# Allegro board QUADCOPTER1mthrbrd1_1.brd
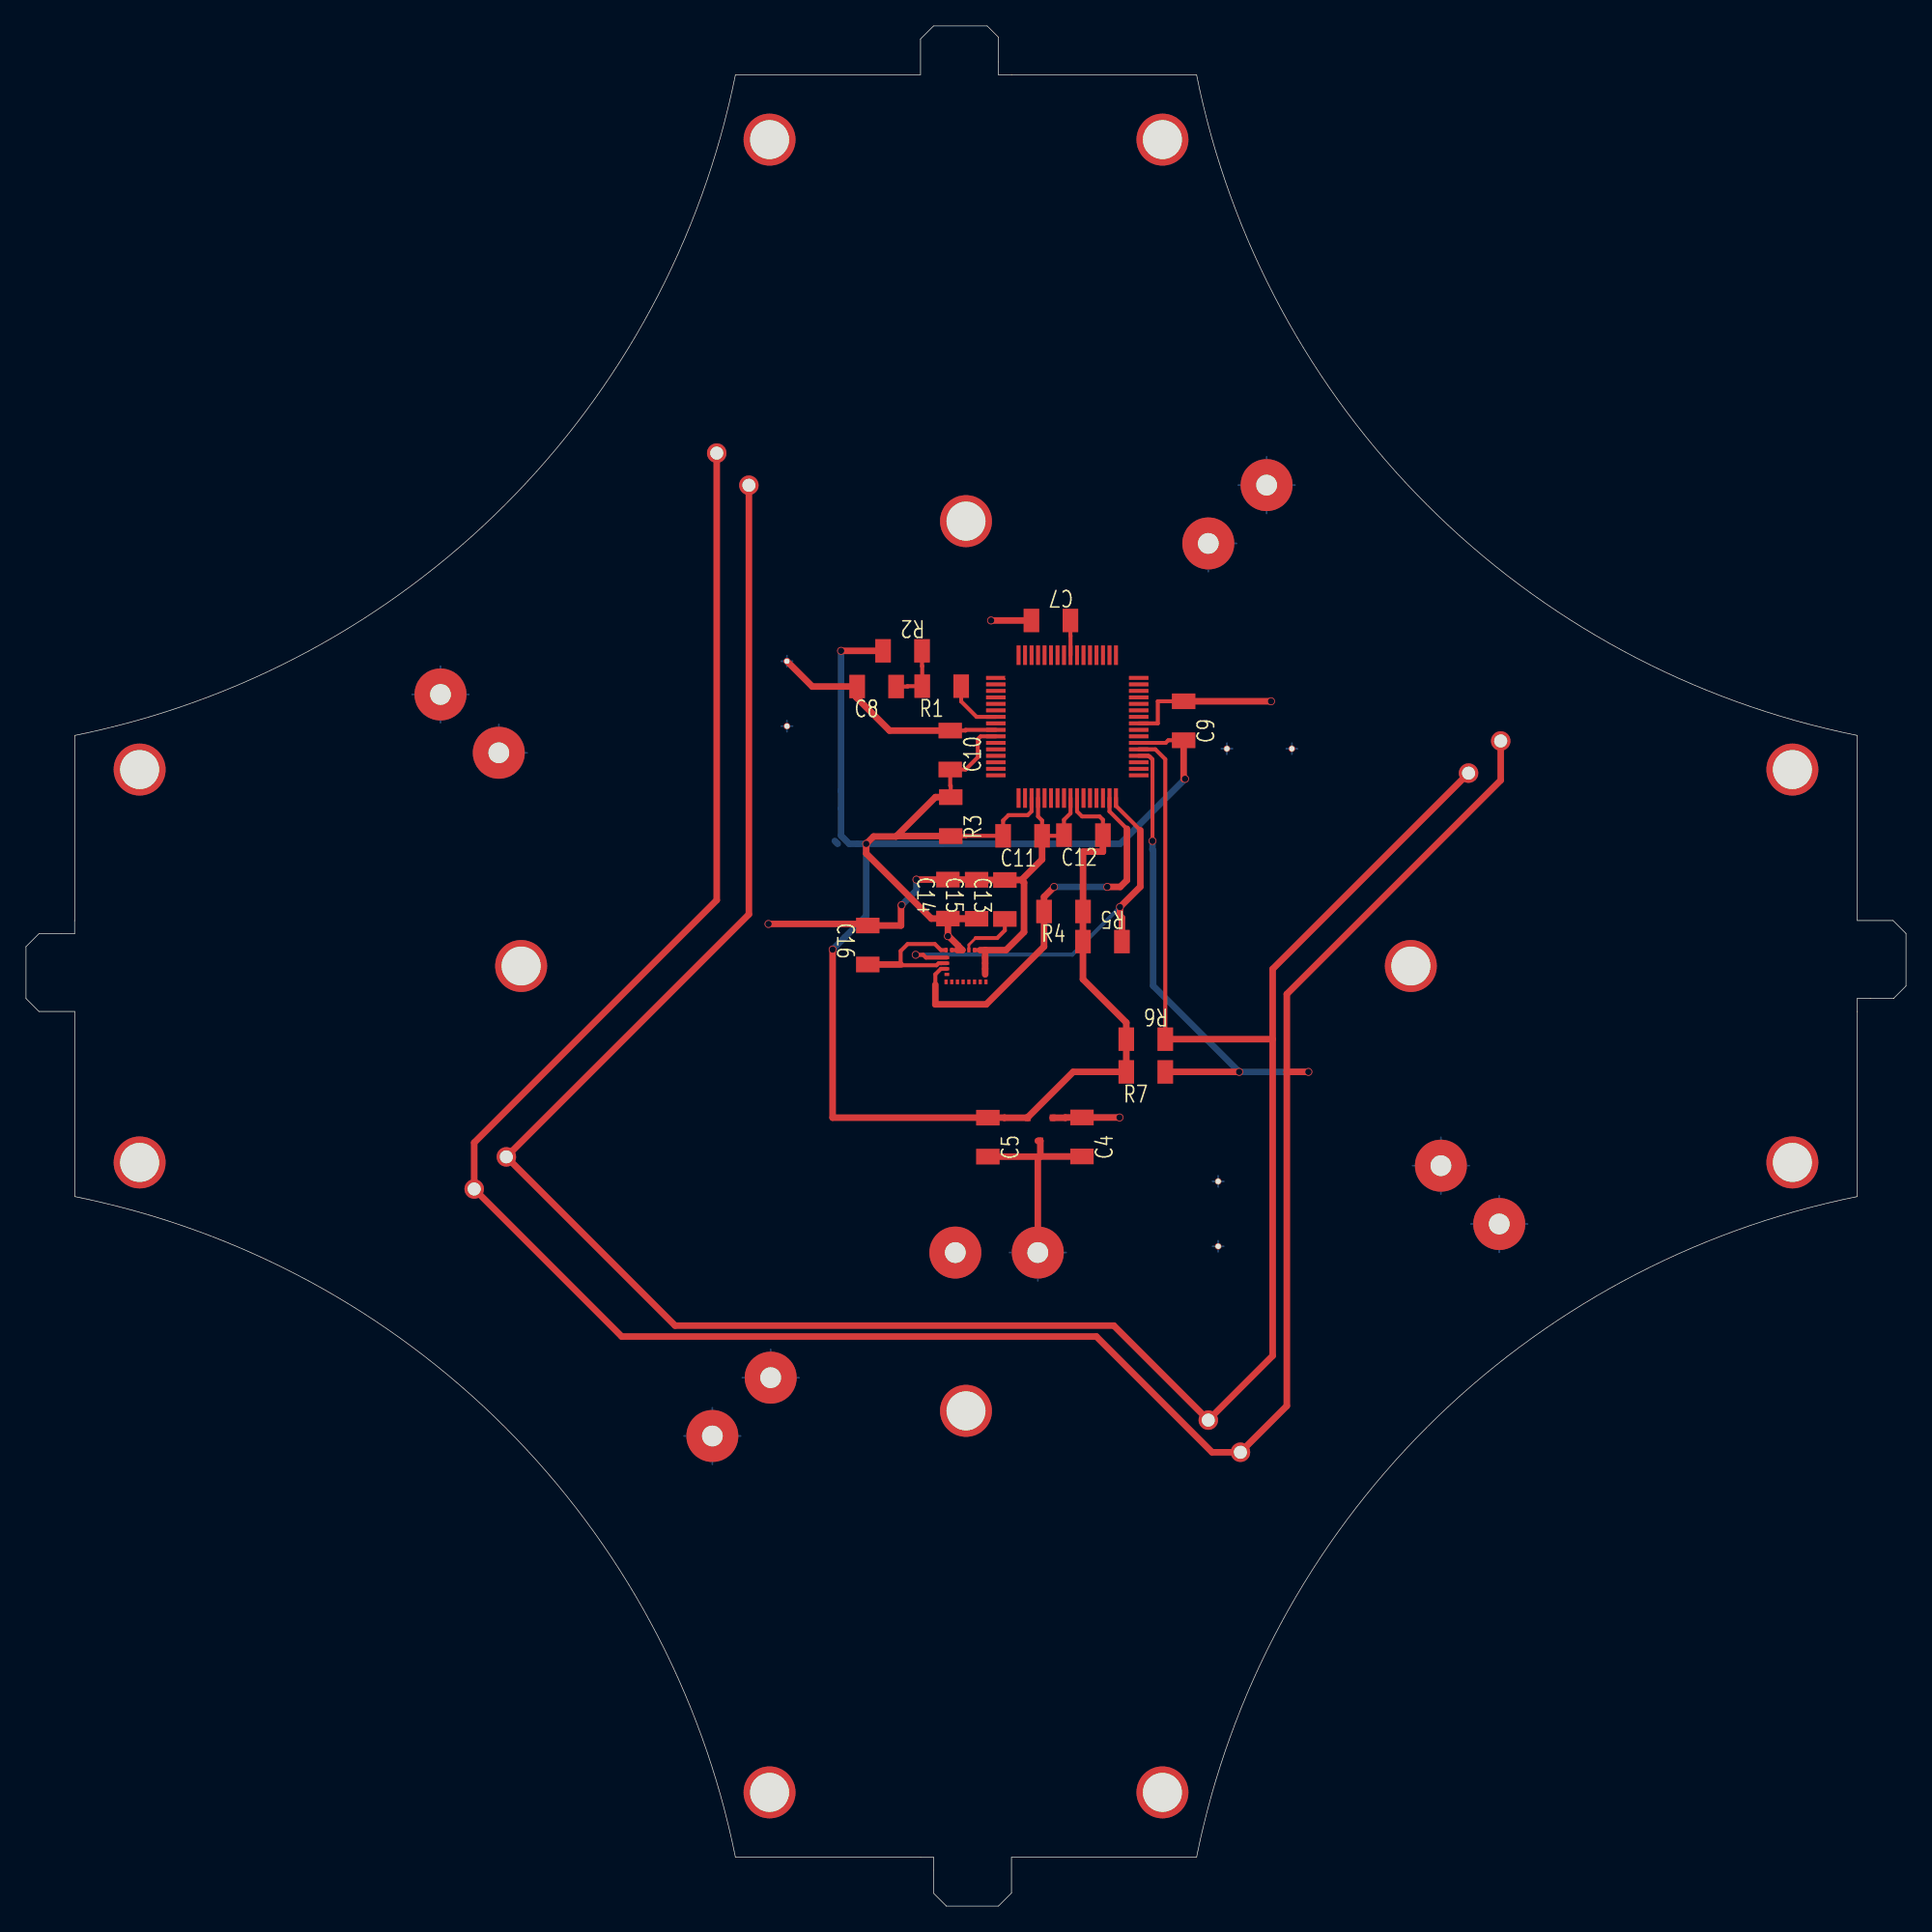
[diagram p0: board, top side]
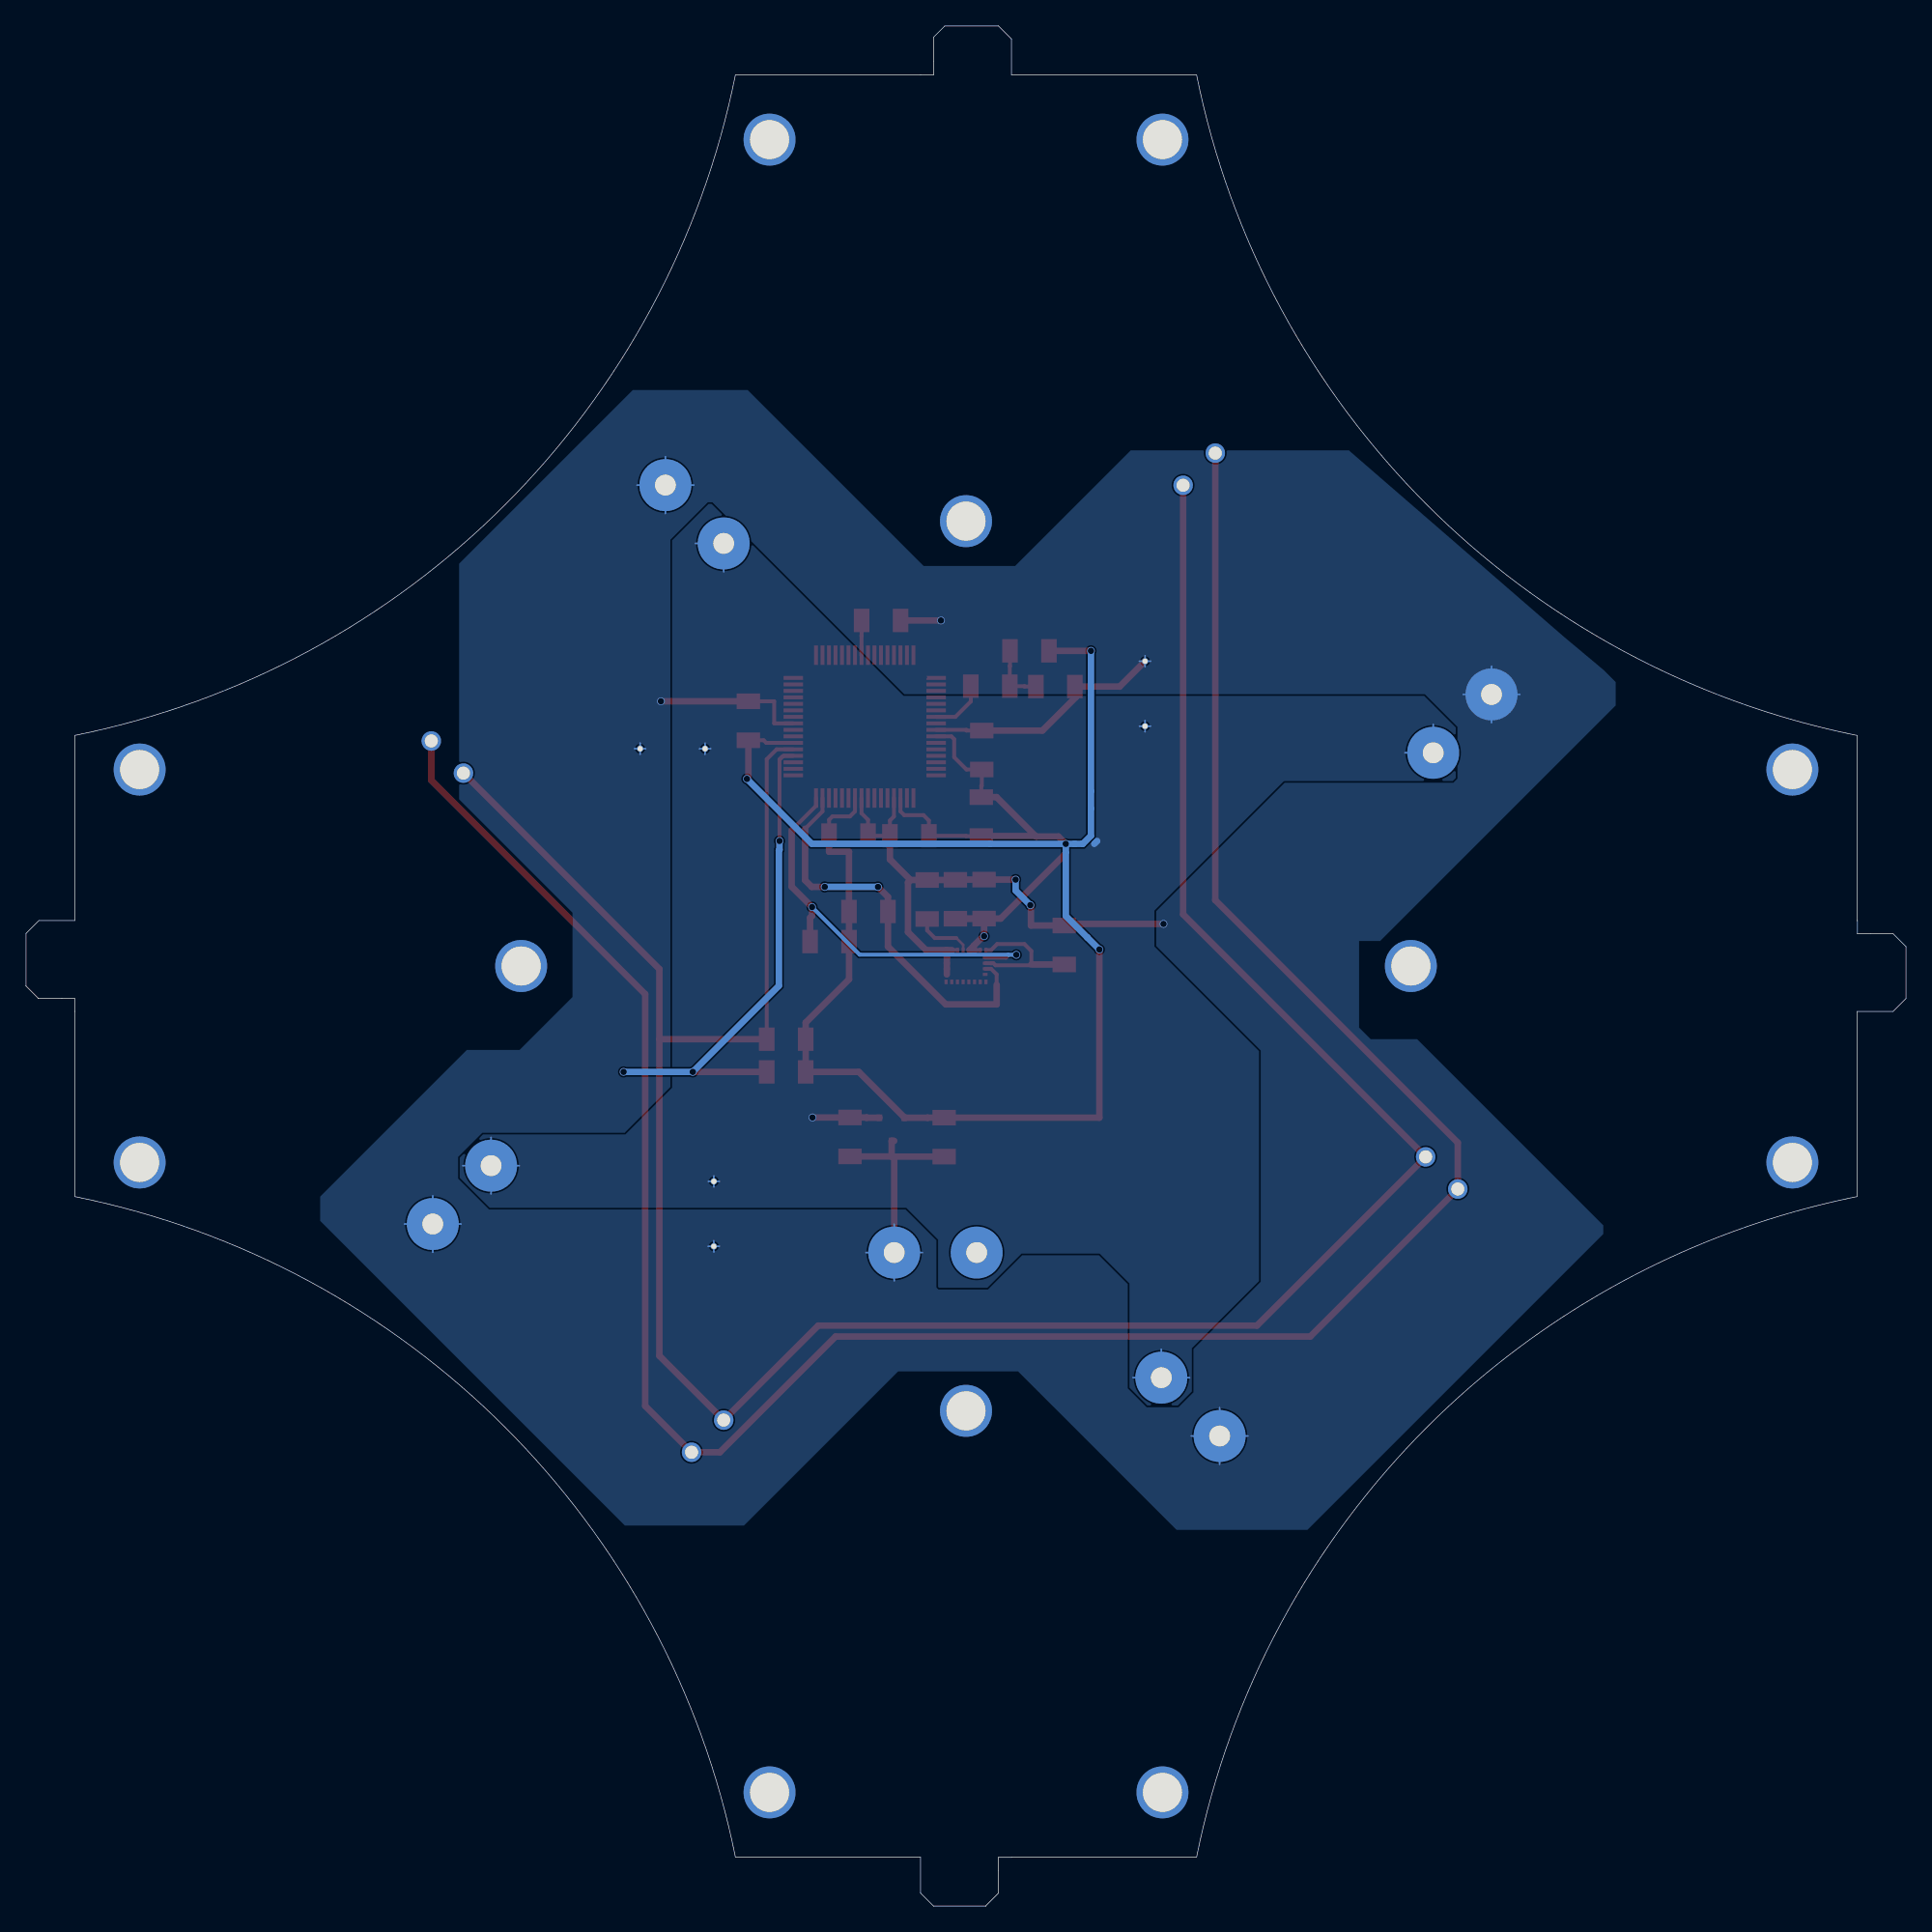
[diagram p1: board, bottom side, seen from below]

Outline 144.75 x 144.75 mm; copper layers: TOP, BOTTOM. Coordinates in mm from the lower left corner of the outline.
Outline path: 0,73.87 0,69.88 1,68.88 3.75,68.88 3.75,54.62 arc(36.87,36.87) 54.62,3.75 68.88,3.75 68.88,3.75 69.86,3.75 69.88,3.73 69.88,0.99 70.86,0.01 70.86,0 74.88,0 75.88,1 75.88,3.75 90.12,3.75 arc(107.88,36.87) 141,54.62 141,68.88 141,68.88 141,68.88 141,69.88 142,69.88 142,69.88 143.81,69.88 143.81,69.89 144.75,70.84 144.75,74.88 143.75,75.88 141,75.88 141,90.12 arc(107.88,107.88) 90.12,141 75.88,141 75.87,141 74.87,141 74.88,142 74.88,143.88 74.01,144.75 69.88,144.75 68.88,143.75 68.88,141 54.62,141 arc(36.87,107.88) 3.75,90.12 3.75,75.88 3.74,75.87 3.74,74.88 3.74,74.88 1.01,74.88 0,73.87

## Placement (name value [footprint] x y rotation side)
C1  100uF  [CAP250]  88.79 58.79 270 top
C2  100uF  [CAP250]  61.59 87.84 90 top
C3  100uF  [CAP250]  89.46 86.11 0 top
C4  10uF  [SMD_CAP_1206]  81.31 59.21 90 top
C5  10uF  [SMD_CAP_1206]  74.06 59.2 90 top
C7  10uF  [SMD_CAP_1206]  78.91 98.98 180 top
C8  10uF  [SMD_CAP_1206]  65.49 93.89 0 top
C9  .1uF  [SMD_CAP_1206]  89.13 91.26 90 top
C10  .1uF  [SMD_CAP_1206]  71.16 89 90 top
C11  .1uF  [SMD_CAP_1206]  76.73 82.4 0 top
C12  .1uF  [SMD_CAP_1206]  81.42 82.45 0 top
C13  10uF  [SMD_CAP_1206]  75.37 77.5 270 top
C14  100nF  [SMD_CAP_1206]  70.98 77.53 270 top
C15  10uF  [SMD_CAP_1206]  73.19 77.51 270 top
C16  100nF  [SMD_CAP_1206]  64.81 73.99 270 top
J1  CON2  [KDCONN2]  71.55 50.31 0 top
J2  CON2  [KDCONN2]  108.94 57 315 top
J3  CON2  [KDCONN2]  57.34 40.68 225 top
J4  CON2  [KDCONN2]  36.4 88.79 135 top
J5  CON2  [KDCONN2]  91.03 104.91 45 top
J6  CON2  [KDCONN2_2]  36.99 57.68 225 top
J7  CON2  [KDCONN2_2]  91.03 37.41 315 top
J8  CON2  [KDCONN2_2]  111.07 87.22 45 top
J9  CON2  [KDCONN2_2]  55.66 109.39 135 top
NOREF  -  [unnamed]  87.5 8.75 0 top
NOREF#2  -  [unnamed]  106.62 72.38 0 top
NOREF#3  -  [unnamed]  57.25 136 0 top
NOREF#4  -  [unnamed]  8.75 57.25 0 top
NOREF#5  -  [unnamed]  38.12 72.38 0 top
NOREF#6  -  [unnamed]  136 57.25 0 top
NOREF#7  -  [unnamed]  72.38 106.62 0 top
NOREF#8  -  [unnamed]  87.5 136 0 top
NOREF#9  -  [unnamed]  8.75 87.5 0 top
NOREF#10  -  [unnamed]  57.25 8.75 0 top
NOREF#11  -  [unnamed]  72.38 38.12 0 top
NOREF#12  -  [unnamed]  136 87.5 0 top
R1  470  [SMD_CAP_1206]  70.5 93.92 0 top
R2  10k  [SMD_CAP_1206]  67.49 96.64 180 top
R3  10  [SMD_CAP_1206]  71.2 83.88 90 top
R4  10k  [SMD_CAP_1206]  79.89 76.57 0 top
R5  10k  [SMD_CAP_1206]  82.88 74.25 180 top
R6  10k  [SMD_CAP_1206]  86.22 66.74 180 top
R7  10k  [SMD_CAP_1206]  86.22 64.22 0 top
U1  PIC32MX440F256H  [PIC32MX440]  80.17 90.81 0 top
U5  LSM330_SENSOR  [SENSOR]  72.38 72.38 0 top
U6  LP38690-TO252  [SOT23]  78.1 59.8 270 top

## Library data of the parts
C1-C3 = CAP
C4 C5 C7-C16 = C
J1-J9 = CON2
R1-R7 = R
U1 = PIC32MX440F256H_9
U5 = LSM330_SENSOR_0
U6 = LP38690-TO252

## Footprints (pads in the part's own frame, mm; a bottom-side part is the same pattern mirrored in y, then rotated)
CAP250
  round 0.5 hole 0.4: 1(3,3) 2(8,3)
KDCONN2
  round 4 hole 1.6: 1(0,0) 2(6.35,0)
KDCONN2_2
  round 1.5 hole 1: 1(0,0) 2(3.5,0)
PIC32MX440
  custom 1.5x0.3 smd: 1(-5.5,3.75)
  rect 1.5x0.3 smd: 2(-5.5,3.25) 3(-5.5,2.75) 4(-5.5,2.25) 5(-5.5,1.75) 6(-5.5,1.25) 7(-5.5,0.75) 8(-5.5,0.25) 9(-5.5,-0.25) 10(-5.5,-0.75) 11(-5.5,-1.25) 12(-5.5,-1.75) 13(-5.5,-2.25) 14(-5.5,-2.75) 15(-5.5,-3.25) 16(-5.5,-3.75) 33(5.5,-3.75) 34(5.5,-3.25) 35(5.5,-2.75) 36(5.5,-2.25) 37(5.5,-1.75) 38(5.5,-1.25) 39(5.5,-0.75) 40(5.5,-0.25) 41(5.5,0.25) 42(5.5,0.75) 43(5.5,1.25) 44(5.5,1.75) 45(5.5,2.25) 46(5.5,2.75) 47(5.5,3.25) 48(5.5,3.75)
  rect 0.3x1.5 smd: 17(-3.75,-5.5) 18(-3.25,-5.5) 19(-2.75,-5.5) 20(-2.25,-5.5) 21(-1.75,-5.5) 22(-1.25,-5.5) 23(-0.75,-5.5) 24(-0.25,-5.5) 25(0.25,-5.5) 26(0.75,-5.5) 27(1.25,-5.5) 28(1.75,-5.5) 29(2.25,-5.5) 30(2.75,-5.5) 31(3.25,-5.5) 32(3.75,-5.5) 49(3.75,5.5) 50(3.25,5.5) 51(2.75,5.5) 52(2.25,5.5) 53(1.75,5.5) 54(1.25,5.5) 55(0.75,5.5) 56(0.25,5.5) 57(-0.25,5.5) 58(-0.75,5.5) 59(-1.25,5.5) 60(-1.75,5.5) 61(-2.25,5.5) 62(-2.75,5.5) 63(-3.25,5.5) 64(-3.75,5.5)
SENSOR
  custom 0.24x0.36 smd: 1(-1.535,1.225)
  rect 0.36x0.24 smd: 2(-1.475,0.645) 3(-1.475,0.215) 4(-1.475,-0.215) 5(-1.475,-0.645) 14(1.475,-0.645) 15(1.475,-0.215) 16(1.475,0.215) 17(1.475,0.645)
  rect 0.24x0.36 smd: 6(-1.535,-1.225) 7(-1.096,-1.225) 8(-0.658,-1.225) 9(-0.219,-1.225) 10(0.219,-1.225) 11(0.658,-1.225) 12(1.097,-1.225) 13(1.535,-1.225) 18(1.535,1.225) 19(1.096,1.225) 20(0.658,1.225) 21(0.219,1.225) 22(-0.219,1.225) 23(-0.658,1.225) 24(-1.097,1.225)
SMD_CAP_1206
  rect 1.2x1.8 smd: 1(-1.5,0) 2(1.5,0)
SOT23
  rect 0.508x0.432 smd: 1(-0.889,0.94) 2(-0.889,-0.965) 3(0.889,0)
unnamed
  round 4 hole 3 unplated: (0,0)

## Nets
3.3V: C5.2 C9.1 C10.1 C11.1 C12.2 C14.2 C15.2 R2.2 R3.1 R3.2 R4.2 R5.2 R6.2 R7.1 U1.10(VDD#10) U1.19(AVDD) U1.26(VDD#26) U1.38(VDD#38) U5.22(VDD#22) U5.23(VDD#23) U5.24(VDD#24) U6.2(VOUT)
12V: C1.1 C2.1 C3.1 C4.2 J2.1 J3.1 J4.1 J5.1 U6.1(VIN)
GND: C1.2 C2.2 C3.2 C4.1 C5.1 C7.2 C8.1 C9.2 C10.2 C11.2 C12.1 C13.1 C14.1 C15.1 C16.1 J1.2 J2.2 J3.2 J4.2 J5.2 U1.9(VSS#9) U1.20(AVSS) U1.25(VSS#25) U1.41(VSS#41) U5.14(RES3) U5.15(RES2) U5.16(RES1) U5.17(RES0) U5.18(RES) U5.19(GND#19) U5.20(GND#20) U6.3(GND)
SCL1: J6.1 J7.1 J8.1 J9.1 R6.1 U1.37(SCL1)
SCL2: R5.1 U1.32(SCL2) U5.2(SCL_A/G)
SDA1: J6.2 J7.2 J8.2 J9.2 R7.2 U1.36(SDA1)
SDA2: R4.1 U1.31(SDA2) U5.4(SDA/SDL_A/G)
N01207: C8.2 R1.1 R2.1
N159586: J1.1
N160545: C16.2 U5.1(VDD_IO#1) U5.3(VDD_IO#3)
N168078: C13.2 U5.21(CAP)
N186406: R1.2 U1.7($0)
N193232: C7.1 U1.56(VCAP)

Pads without a net: U1 1 2 3 4 5 6 8 11 12 13 14 15 16 17 18 21 22 23 24 27 28 29 30 33 34 35 39 40 42 43 44 45 46 47 48 49 50 51 52 53 54 55 57 58 59 60 61 62 63 64; U5 5 6 7 8 9 10 11 12 13

## Via types
v1: diameter 0.6, hole 0.5, TOP to BOTTOM, 18 vias

## Routing (per net, layer and track width the routed paths; a pad name or vN(x,y) marks a point on that pad's centre or on a via; arc(x,y) is an arc through that point)
3.3V: length 169.7
  TOP w0.3: U5.23 U5.24 ; U1.38 87.75,89.56 87.95,89.76 C9.1 ; U1.26 80.92,84.28 81.31,83.89 82.66,83.89 82.92,83.63 C12.2 ; R3.1 72.38,82.38 72.38,82.4 C11.1 75.23,83.58 75.65,83.99 77.13,83.99 77.42,84.28 U1.19 ; R3.2 71.2,86.25 71.16,86.25 71.16,87.5 72.34,87.5 73.28,88.45 73.28,89.84 73.5,90.06 U1.10 ; 72.1,73.6 U5.22
  TOP w0.5: C9.1 89.13,86.78 v1(89.24,86.78) ; 67.02,82.38 66.99,82.34 65.26,82.34 v1(64.69,81.78) 64.69,81.04 69.7,76.03 C14.2 ; 67.02,82.38 70.02,85.38 R3.2 ; 67.02,82.38 R3.1 ; C12.2 82.92,81.18 81.39,81.18 R4.2 81.38,76.57 R5.2 81.38,71.35 84.72,68.02 R6.2 R7.1 80.63,64.22 77.13,60.73 U6.2 75.34,60.69 75.34,60.7 C5.2 62.11,60.7 v1(62.11,73.64) ; 71.91,76.01 C15.2 73.19,76.03 C14.2 ; C14.2 70.98,74.67 v1(70.98,74.67) 71.04,74.67 71.78,73.94 71.78,73.92 72.1,73.6 U5.23 ; R2.2 v1(62.75,96.64)
  BOTTOM w0.5: v1(89.24,86.78) 84.24,81.79 70.56,81.79 70.55,81.78 v1(64.69,81.78) ; v1(62.75,96.64) 62.75,85.86 62.75,84.48 62.75,84.48 62.75,82.41 63.38,81.78 64.02,81.78 64.02,81.78 v1(64.69,81.78) ; v1(64.69,81.78) 64.69,81.1 64.69,76.23 63.04,74.57 v1(62.11,73.64)
12V: length 34.6
  TOP w0.5: v1(84.2,60.71) C4.2 80.03,60.71 80.03,60.69 U6.1
  BOTTOM w0.127: 92.46,88.68 C3.1 ; C3.1 92.04,89.11 ; C3.1 92.46,89.53 ; C3.1 92.89,89.11 ; 36.4,90.97 J4.1 38.58,88.79 ; 91.36,55.79 C1.1 ; C1.1 92.22,55.79 ; C1.1 91.79,55.36 ; C1.1 91.79,56.22 ; J2.1 111.12,57 ; J2.1 108.94,59.18 ; J2.1 108.94,54.82 ; J2.1 106.76,57 ; C2.1 58.59,91.27 ; C2.1 58.16,90.84 ; C2.1 59.02,90.84 ; C2.1 58.59,90.41 ; 55.16,40.68 J3.1 ; J3.1 57.34,42.86 ; J3.1 59.51,40.68 ; 93.21,104.91 J5.1 91.03,102.73
  BOTTOM w0.5: 62.28,82 62.5,81.78
GND: length 143.4
  TOP w0.3: U1.20 77.92,83.89 78.23,83.58 C11.2 79.92,82.4 C12.1 79.92,83.63 80.42,84.14 U1.25 ; C9.2 87.14,92.76 87.14,91.06 U1.41 ; C10.2 72.34,90.5 72.34,90.56 U1.9 ; U5.20 U5.19
  TOP w0.5: C2.2 60.54,93.89 63.92,93.89 ; 73.85,73.6 U5.18 75.46,73.6 76.84,74.99 76.84,78.8 76.64,79 ; 73.85,73.6 U5.17 U5.16 U5.15 U5.14 ; 73.85,73.6 U5.19 ; 63.92,93.89 C8.1 ; 63.92,93.89 63.92,93.08 66.49,90.5 C10.2 ; 76.64,79 78.23,80.59 C11.2 ; 76.64,79 C13.1 73.19,79 C15.1 73.19,79.03 C14.1 v1(68.56,79.03) ; 78.1,57.71 78.08,57.7 77.9,57.7 ; 78.1,57.71 C4.1 ; 78.1,57.71 U6.3 77.9,58.91 ; 77.9,57.7 J1.2 ; 77.9,57.7 C5.1 ; v1(57.17,75.61) 64.81,75.61 C16.1 67.37,75.49 67.37,77.01 v1(67.42,77.06) ; C7.2 v1(74.3,98.98) ; C9.2 v1(95.86,92.76)
  BOTTOM w0.127: J4.2 31.91,95.46 ; J4.2 29.74,93.28 ; J4.2 34.09,93.28 ; J4.2 31.91,91.1 ; 52.85,34.01 J3.2 ; J3.2 52.85,38.37 ; J3.2 55.02,36.19 ; J3.2 50.67,36.19 ; 93.34,109.4 J5.2 ; J5.2 95.52,111.58 ; J5.2 95.52,107.22 ; J5.2 97.7,109.4 ; C3.2 97.46,89.53 ; C3.2 97.89,89.11 ; C3.2 97.04,89.11 ; C3.2 97.46,88.68 ; 113.43,50.33 J2.2 ; J2.2 113.43,54.69 ; J2.2 115.61,52.51 ; J2.2 111.25,52.51 ; C1.2 91.79,51.22 ; C1.2 92.22,50.79 ; C1.2 91.36,50.79 ; C1.2 91.79,50.36 ; C2.2 58.59,96.27 ; C2.2 58.59,95.41 ; C2.2 59.02,95.84 ; C2.2 58.16,95.84 ; 75.73,50.31 J1.2 ; J1.2 77.9,48.13 ; J1.2 77.9,52.49 ; J1.2 80.08,50.31
  BOTTOM w0.5: v1(68.56,79.03) 68.56,78.19 v1(67.42,77.06)
SCL1: length 212.2
  TOP w0.3: U1.37 86.95,89.06 87.72,88.29 R6.1
  TOP w0.5: J8.1 95.98,72.14 95.98,66.74 ; 95.98,66.74 95.98,42.37 J7.1 83.75,44.69 49.98,44.69 J6.1 55.66,76.35 J9.1 ; 95.98,66.74 R6.1
SCL2: length 32.3
  TOP w0.3: U5.2 69.29,73.02 69.08,73.24 v1(68.5,73.24) ; 85.8,82.83 83.92,84.71 U1.32
  TOP w0.5: 85.8,82.83 85.8,78.48 v1(84.23,76.91) 84.23,76.24 84.38,76.08 R5.1
  BOTTOM w0.3: v1(84.23,76.91) 80.56,73.25 69.09,73.25 69.08,73.24 v1(68.5,73.24)
SDA1: length 235.5
  TOP w0.3: U1.36 86.43,88.56 86.51,88.48 86.54,88.48 86.7,88.32 86.7,88.29 86.73,88.26 v1(86.73,82.01)
  TOP w0.5: 97.08,64.22 97.08,70.21 113.54,86.68 J8.2 ; 97.08,64.22 97.08,38.51 J7.2 91.32,34.94 82.41,43.85 45.87,43.85 J6.2 34.51,58.77 53.18,77.45 J9.2 ; 97.08,64.22 v1(98.74,64.22) ; R7.2 v1(93.41,64.22)
  BOTTOM w0.5: v1(98.74,64.22) v1(93.41,64.22) 86.78,70.85 86.78,81.28 86.73,81.33 v1(86.73,82.01)
SDA2: length 31.2
  TOP w0.3: 70.01,70.93 70.01,71.73 70.44,72.16 U5.4 ; U1.31 83.42,84.28 84.76,82.94 ; 78.98,78.29 v1(79.15,78.46) ; R4.1 78.39,76.67
  TOP w0.5: 78.39,76.67 78.39,77.7 78.98,78.29 ; v1(83.25,78.46) 84.25,78.46 84.76,78.98 84.76,82.94 ; 70.01,70.93 70.01,69.42 73.93,69.42 78.39,73.87 R4.1
  BOTTOM w0.5: v1(83.25,78.46) v1(79.15,78.46)
N01207: length 4.8
  TOP w0.3: R2.1 68.99,95.46 69,95.46 R1.1 67.87,93.92 67.87,93.89 C8.2
N160545: length 11.2
  TOP w0.3: 67.34,72.56 67.34,72.49 ; 67.34,72.56 67.47,72.43 70.11,72.43 70.27,72.59 70.44,72.59 70.44,72.59 U5.3 ; 67.34,72.56 67.34,73.53 67.88,74.07 69.98,74.07 70.44,73.6 U5.1
  TOP w0.5: 67.34,72.49 C16.2
N168078: length 4.5
  TOP w0.2: U5.21 72.59,74.01 73.11,74.53
  TOP w0.3: C13.2 75.37,75.12 74.77,74.53 73.11,74.53
N186406: length 4.3
  TOP w0.3: R1.2 72,92.74 73.19,91.56 U1.7
N193232: length 2.7
  TOP w0.3: C7.1 80.41,97.8 80.42,97.8 U1.56

## Copper pours and planes (outline as drawn; the poured copper is in the pictures)
12V on BOTTOM: 56.07,38.53 54.99,39.61 54.99,42.94 49.81,48.12 49.81,65.82 57.87,73.88 57.87,76.64 47.89,86.61 34.91,86.61 34.66,86.86 34.66,90.74 37.1,93.17 77.18,93.17 91.96,107.95 92.19,107.95 95.01,105.14 95.01,63.03 94.99,63.02 98.6,59.41 109.56,59.41 111.35,57.62 111.35,56.06 109.04,53.76 76.97,53.76 74.52,51.31 74.52,47.67 74.45,47.6 70.73,47.6 68.13,50.2 68.13,50.22 68.11,50.23 62.09,50.23 59.79,47.93 59.79,39.91 58.41,38.53
GND on BOTTOM: 46.09,28.96 23.31,51.74 23.31,52.41 37.64,66.74 41.22,66.74 42.11,67.64 42.11,74.3 40.49,74.3 22.36,92.43 22.36,94.24 23.23,95.11 23.23,95.12 23.28,95.16 26.2,97.61 42.9,112.08 59.69,112.08 68.59,103.18 75.64,103.18 89.19,116.72 98.02,116.72 111.4,103.34 111.4,85.21 102.67,76.48 102.67,69.98 106.75,65.91 110.81,65.91 122.1,54.62 122.1,52.75 98.64,29.3 89.46,29.3 77.6,41.16 68.36,41.16 56.16,28.96 ; 1 cut-out
